# Altium PCB PiMX8MP_r0.3.PcbDoc (part 4 of 10)
Units mm, origin at the board's own origin, x right, y up, seen from the top; angles counter-clockwise.
Board outline 55 x 40 mm, 10 copper layers (Top Layer, Layer 1, Layer 2, Layer 3, Layer 4, Layer 5, Layer 6, Layer 7, Layer 8, Bottom Layer), stack 1.472 mm thick; 545 components, 477 nets, 2606 pads, 2278 vias.
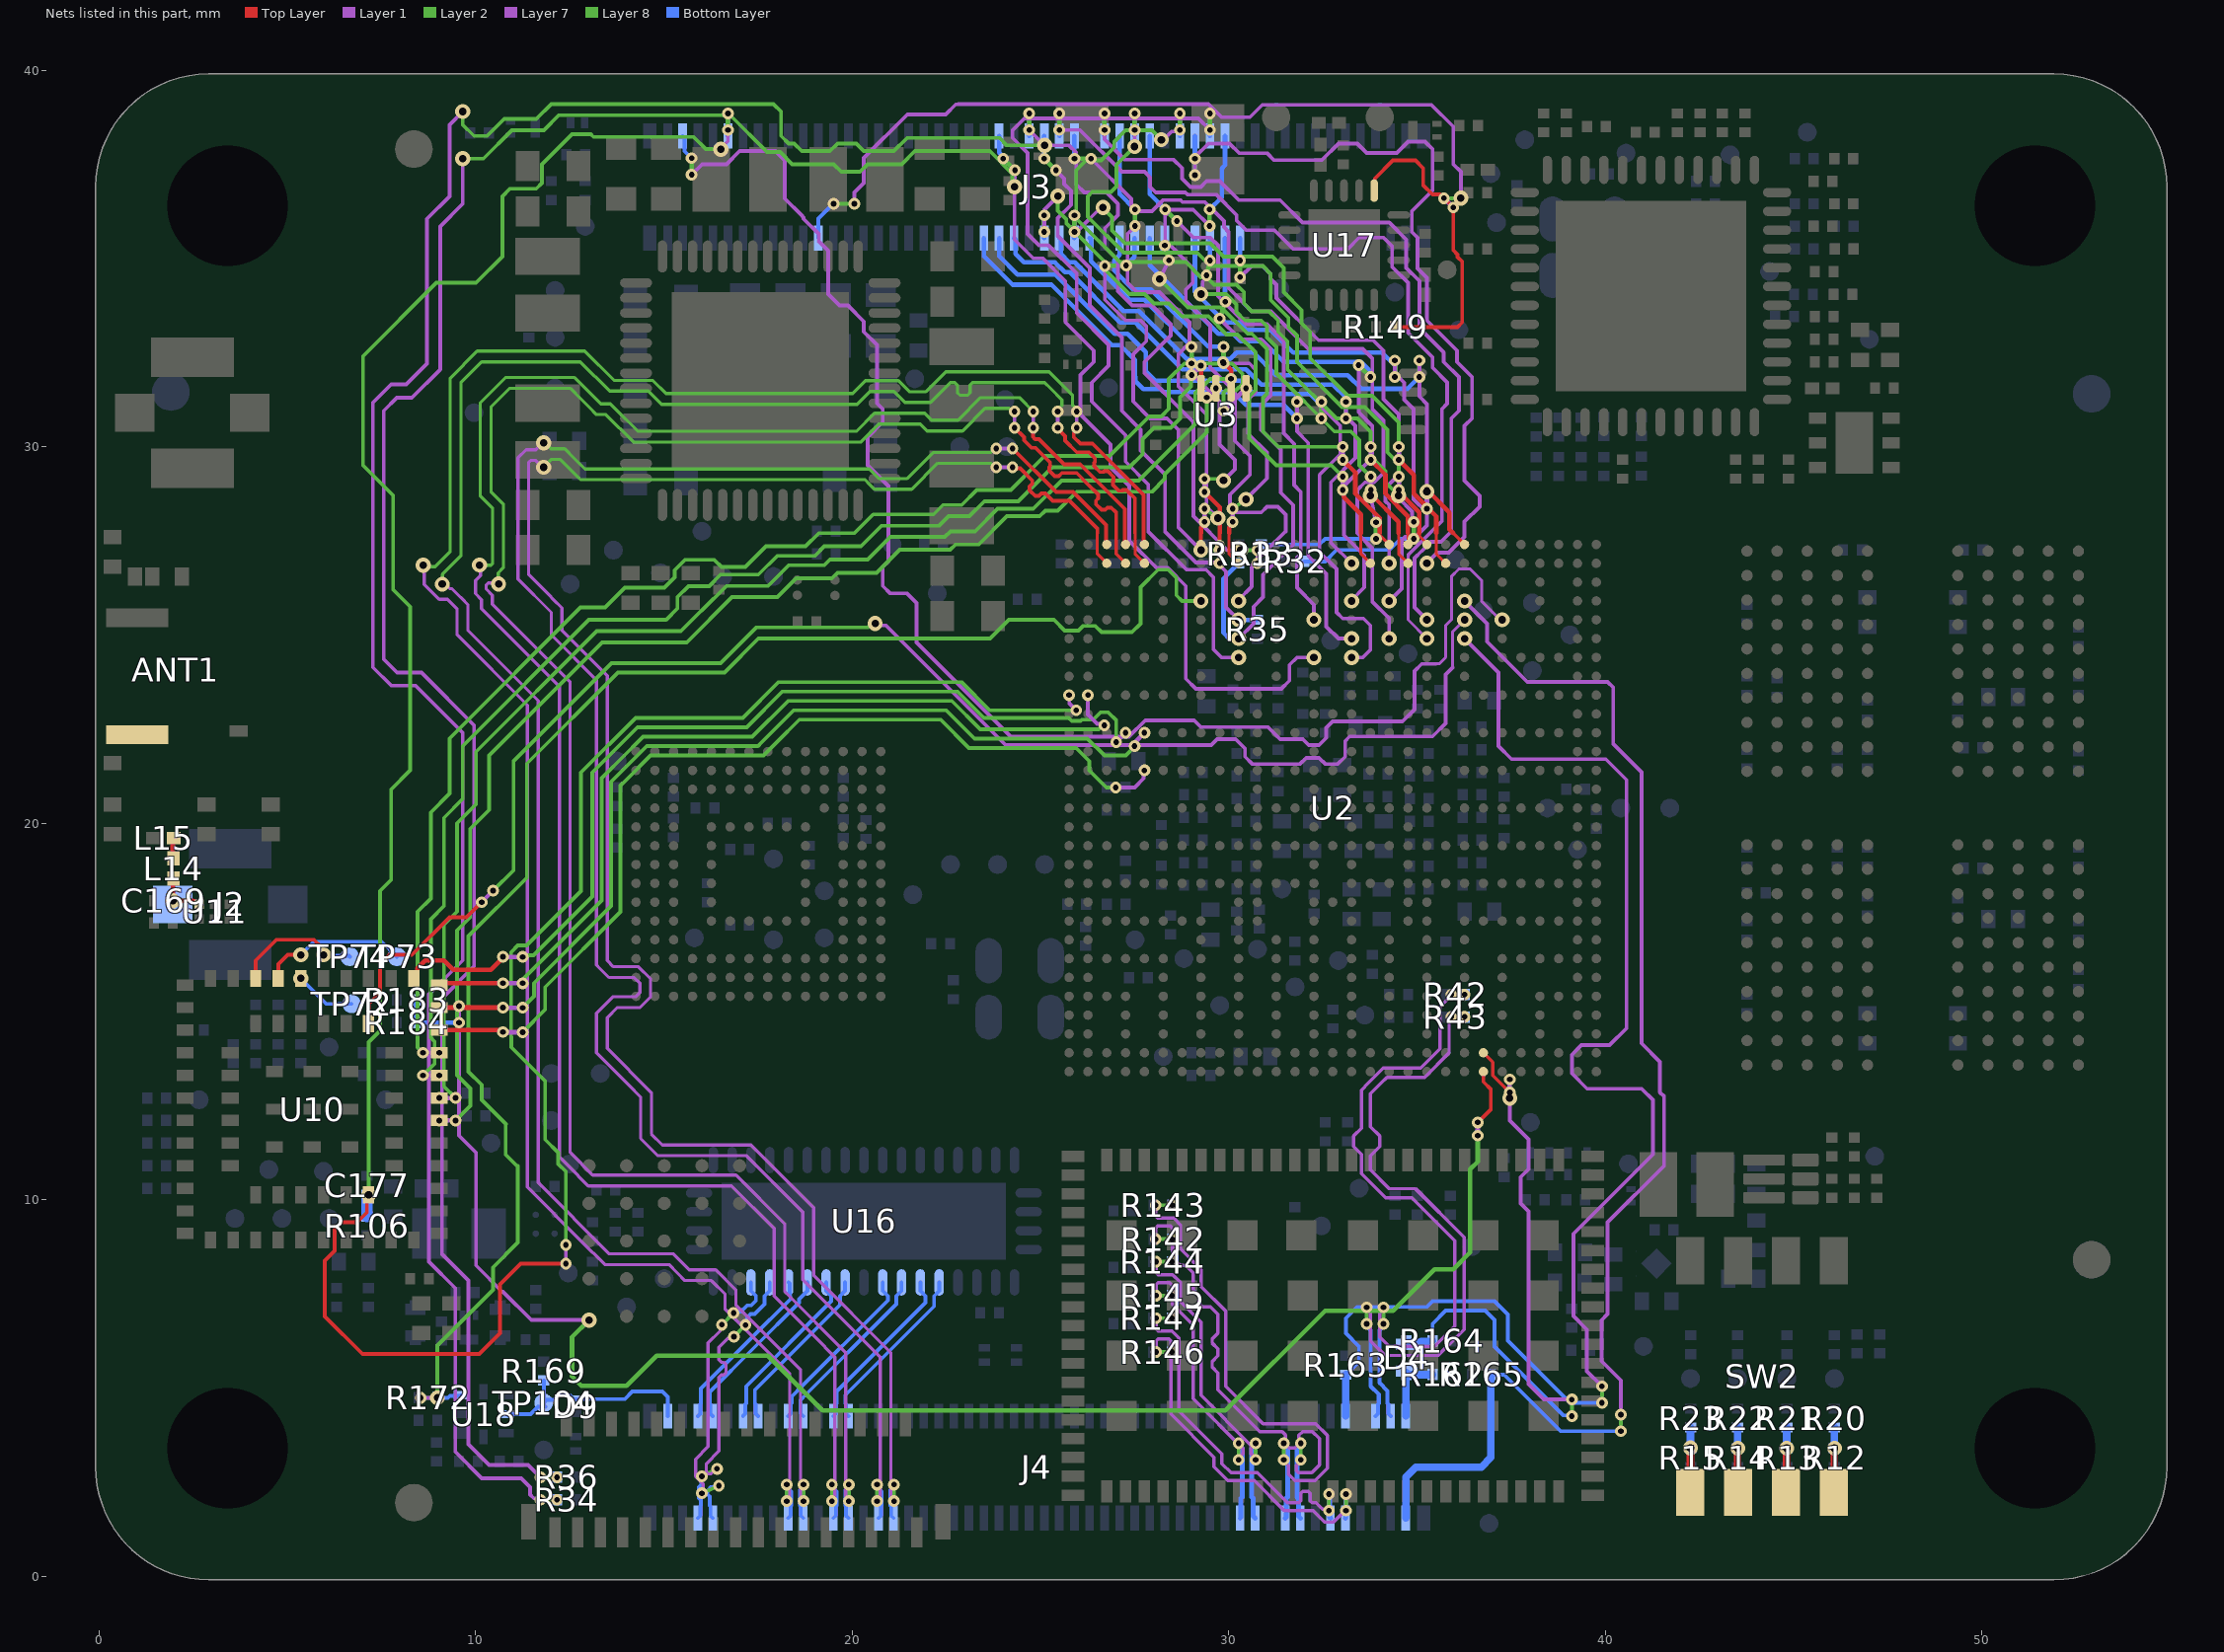
[diagram p12: the nets of this part, all layers, seen from the top]

## Via types
v1: diameter 0.4, hole 0.2, Top Layer to Bottom Layer, tented both sides, 946 vias
v2: diameter 0.31, hole 0.15, Top Layer to Layer 1, tented both sides, 321 vias
v3: diameter 0.31, hole 0.15, Layer 8 to Bottom Layer, tented both sides, 315 vias
v4: diameter 0.31, hole 0.15, Layer 1 to Layer 2, tented both sides, 257 vias
v5: diameter 0.31, hole 0.15, Layer 7 to Layer 8, tented both sides, 198 vias
v6: diameter 0.4, hole 0.2, Layer 2 to Layer 7, tented both sides, 169 vias
v7: diameter 0.31, hole 0.15, Top Layer to Layer 1, tented top, 72 vias

## Nets (pads, with @x,y where several pads share a name; then routed paths per layer and width w, separated by ;. In a path a pad name is that pad's centre, name@x,y a point inside that pad or via, vN(x,y) a via of type N, cw(c..) or ccw(c..) an arc to the next point about the centre after c; other vN are vias at no path point) (continued)
BB_CON_HDMI0_SDA: D9.1 J4.99 R169.1 TP104.TP U18.6 | length 5.9
  Bottom Layer w0.1: U18.6@10.812,4.304 11.462,4.304 11.657,4.499 TP104.TP@11.856,4.499 ; TP104.TP@11.812,4.494 TP104.TP@11.812,4.604 ; R169.1@11.812,5.204 TP104.TP@11.812,4.604 ; J4.99@15.102,4.254 15.102,4.764 14.962,4.904 14.162,4.904 13.962,4.704 12.612,4.704 12.512,4.804 12.212,4.804 12.089,4.681 11.889,4.681 TP104.TP@11.812,4.604
BB_CON_HDMI0_SDA_DYN: R172.1 U2.AF22 U18.3 | length 42
  Layer 2 w0.1: v6(8.987,4.739) 8.987,6.129 10.462,7.604 10.462,8.204 11.123,8.865 11.123,10.894 11.117,10.9 ; 11.1,10.9 10.8,11.2 10.8,12 10.808,12.008 10.162,12.654 10.162,13.054 9.812,13.404 9.812,17.004 11.362,18.554 11.362,21.584 13.782,24.004 16.612,24.004 17.512,24.904 23.662,24.904 24.162,25.404 25.359,25.404 25.644,25.119 26.011,25.119 26.131,25.239 26.461,25.239 26.626,25.074 27.126,25.074 27.432,25.074 27.662,25.304 27.662,26.271 28.126,26.734 28.399,26.734 28.612,26.521 28.612,26.054 28.762,25.904 v1(29.262,25.904)
  Layer 7 w0.1: v5(8.547,4.739) v6(8.987,4.739)
  Layer 8 w0.1: v5(8.547,4.739) v6(8.987,4.739)
  Bottom Layer w0.1: v6(8.987,4.739) 9.267,4.739 9.321,4.793 9.601,4.793 U18.3@9.612,4.804
  other v3: 8.987,4.739
BB_CON_HDMI0_TX0_N: J4.84 U2.AJ25 | length 60.5
  Top Layer w0.1: v2(25.962,30.504) 25.962,30.448 25.885,30.371 25.885,30.258 26.059,30.084 26.382,30.084 27.742,28.724 27.742,27.704 27.742,27.442 U2.AJ25@27.734,27.433
  Layer 1 w0.1: v2(25.962,30.504) v4(25.962,30.937)
  Layer 2 w0.085: v6@8.712,26.754 8.772,26.815 8.925,26.815 9.327,27.217 9.327,31.823 10.044,32.539 12.901,32.539 13.679,31.762 13.871,31.762 ; 14.062,31.762 13.871,31.762 ; v4(25.962,30.937) 25.962,30.992 25.855,31.099 25.855,31.365 25.23,31.989 24.924,31.989 24.394,31.989 22.49,31.989 21.962,31.462 21.52,31.462 21.228,31.754 20.355,31.754 20.012,31.412 15.055,31.412 14.705,31.762 13.871,31.762
  Layer 7 w0.085: v6(8.612,26.854) 8.637,26.83 8.637,26.346 9.035,25.947 9.254,25.947 9.512,25.689 9.512,25.004 11.379,23.138 11.379,10.335 12.811,8.903 13.437,8.277 15.137,8.277 15.361,8.053 15.559,7.854 16.262,7.854 16.627,7.489 16.627,7.089 18.345,5.372 18.345,2.138 18.262,2.055 v5(18.262,1.994) ; v5@18.312,1.954 v5@18.312,1.994
  Layer 8 w0.1: v5(18.262,1.994) v3(18.262,2.434)
  Bottom Layer w0.1: v3(18.262,2.434) 18.262,2.381 18.387,2.256 18.387,1.883 18.367,1.863 18.367,1.609 J4.84@18.302,1.544
BB_CON_HDMI0_TX0_P: J4.82 U2.AH25 | length 60.2
  Top Layer w0.08: 27.512,27.704 27.512,27.517 27.512,27.154 U2.AH25@27.762,26.904
  Top Layer w0.1: v2(25.462,30.504) 25.462,30.476 25.655,30.283 25.655,30.163 25.964,29.854 26.287,29.854 26.4,29.742 26.448,29.694 26.448,29.595 26.431,29.577 26.431,29.478 26.579,29.33 26.678,29.33 26.695,29.347 26.794,29.347 26.943,29.199 26.943,29.1 26.926,29.082 26.926,28.983 27.074,28.835 27.173,28.835 27.19,28.852 27.289,28.852 27.325,28.817 27.512,28.629 27.512,27.704
  Layer 1 w0.1: v2(25.462,30.504) v4(25.462,30.937)
  Layer 2 w0.085: v6@9.126,26.461 9.126,26.613 9.612,27.099 9.612,31.704 10.162,32.254 12.783,32.254 13.561,31.477 14.587,31.477 14.937,31.127 20.13,31.127 20.473,31.469 21.11,31.469 21.402,31.177 22.08,31.177 22.42,31.517 22.608,31.704 22.731,31.704 22.798,31.637 22.798,31.435 22.865,31.368 23.066,31.368 23.133,31.435 23.133,31.637 23.2,31.704 23.312,31.704 24.512,31.704 25.042,31.704 25.112,31.704 25.262,31.554 25.57,31.247 25.57,31.099 25.462,30.992 v4(25.462,30.937)
  Layer 7 w0.085: v6(9.116,26.351) 9.201,26.351 9.32,26.232 9.372,26.232 9.556,26.048 9.63,25.974 9.797,25.807 9.797,25.123 11.664,23.256 11.664,10.453 13.555,8.562 15.255,8.562 15.479,8.338 15.677,8.139 16.38,8.139 16.912,7.608 16.912,7.208 18.63,5.49 18.63,2.138 18.712,2.055 v5(18.712,1.994)
  Layer 8 w0.1: v5(18.712,1.994) v3(18.712,2.434)
  Bottom Layer w0.1: 18.617,2.283 18.617,1.883 18.637,1.863 18.637,1.609 J4.82@18.702,1.544
BB_CON_HDMI0_TX1_N: J4.78 U2.AJ26 | length 58.3
  Top Layer w0.1: v2(24.812,30.504) 24.802,30.494 24.802,30.263 24.861,30.204 24.962,30.204 25.632,29.534 26.057,29.534 27.242,28.35 27.242,27.442 U2.AJ26@27.234,27.433
  Layer 1 w0.1: v2(24.812,30.504) v4(24.812,30.937)
  Layer 2 w0.085: v6@10.209,26.807 10.254,26.852 10.405,26.852 10.455,26.902 10.455,28.362 10.127,28.689 10.127,31.173 10.794,31.839 12.63,31.839 13.329,31.14 13.579,31.14 13.7,31.02 14.308,30.412 20.117,30.412 20.594,30.889 21.927,30.889 22.111,30.706 22.814,30.706 23.414,31.306 24.443,31.306 v4(24.812,30.937)
  Layer 7 w0.085: v6(10.109,26.858) 10.133,26.834 10.133,26.58 10,26.447 10,26.101 10.161,25.94 10.161,25.703 12.229,23.635 12.229,11.135 12.461,10.903 12.994,10.369 16.797,10.369 17.927,9.239 17.927,7.439 19.012,6.354 19.545,5.822 19.545,2.138 19.462,2.055 v5(19.462,1.994)
  Layer 8 w0.1: v5(19.462,1.994) v3(19.462,2.434)
  Bottom Layer w0.1: v3(19.462,2.434) 19.462,2.381 19.587,2.256 19.587,1.883 19.567,1.863 19.567,1.609 J4.78@19.502,1.544
BB_CON_HDMI0_TX1_P: J4.76 U2.AH26 | length 58.2
  Top Layer w0.08: 27.012,27.704 27.012,27.517 27.012,27.154 U2.AH26@27.262,26.904
  Top Layer w0.1: v2(24.312,30.504) 24.566,30.251 24.566,30.227 24.572,30.221 24.572,30.168 24.765,29.974 24.867,29.974 24.975,29.867 25.257,29.584 25.257,29.485 25.235,29.463 25.235,29.364 25.384,29.215 25.483,29.215 25.572,29.304 25.887,29.304 25.962,29.304 26.253,29.014 26.536,28.731 26.536,28.632 26.476,28.572 26.476,28.473 26.625,28.325 26.724,28.325 26.783,28.384 26.882,28.384 27.004,28.262 27.012,28.254 27.012,27.704
  Layer 1 w0.1: v2(24.312,30.504) v4(24.312,30.937)
  Layer 2 w0.085: v6@10.622,26.465 10.606,26.481 10.606,26.651 10.74,26.784 10.74,28.48 10.412,28.808 10.412,31.054 10.912,31.554 12.512,31.554 12.812,31.254 13.012,31.054 13.211,30.855 13.461,30.855 14.19,30.127 20.235,30.127 20.712,30.604 21.809,30.604 21.993,30.421 22.932,30.421 23.532,31.021 24.167,31.021 24.251,30.937 v4(24.312,30.937)
  Layer 7 w0.085: v6(10.612,26.354) 10.588,26.379 10.334,26.379 10.285,26.329 10.285,26.219 10.446,26.058 10.446,25.821 11.112,25.154 11.13,25.136 12.514,23.753 12.514,11.253 13.112,10.654 16.915,10.654 18.212,9.358 18.212,7.558 19.83,5.94 19.83,2.138 19.912,2.055 v5(19.912,1.994)
  Layer 8 w0.1: v5(19.912,1.994) v3(19.912,2.434)
  Bottom Layer w0.1: 19.817,2.283 19.817,1.883 19.837,1.863 19.837,1.609 J4.76@19.902,1.544
BB_CON_HDMI0_TX2_N: J4.72 U2.AJ27 | length 54
  Top Layer w0.1: v2(24.262,29.954) 25.42,28.797 25.87,28.797 26.742,27.924 26.742,27.442 U2.AJ27@26.734,27.433
  Layer 1 w0.1: v4(23.83,29.954) v2(24.262,29.954)
  Layer 2 w0.085: v6@11.812,30.054 11.897,30.054 12.005,29.947 12.37,29.947 12.612,29.704 12.905,29.412 20.458,29.412 20.714,29.156 21.464,29.156 22.155,29.847 23.668,29.847 23.775,29.954 v4(23.83,29.954)
  Layer 7 w0.085: v6(11.812,30.104) 11.787,30.104 11.605,29.922 11.344,29.922 11.127,29.705 11.127,26.486 12.012,25.601 12.012,25.001 13.212,23.801 13.212,16.236 13.296,16.153 13.544,15.904 14.212,15.904 14.362,15.754 14.362,15.504 14.247,15.389 13.644,15.389 13.212,14.958 13.212,13.901 14.061,13.053 14.386,12.728 14.386,11.628 14.844,11.169 17.197,11.169 18.692,9.674 18.692,7.874 19.912,6.654 20.745,5.822 20.745,2.138 20.662,2.055 v5(20.662,1.994)
  Layer 8 w0.1: v5(20.662,1.994) v3(20.662,2.434)
  Bottom Layer w0.1: v3(20.662,2.434) 20.662,2.381 20.787,2.256 20.787,1.883 20.767,1.863 20.767,1.609 J4.72@20.702,1.544
BB_CON_HDMI0_TX2_P: J4.70 U2.AH27 | length 53.9
  Top Layer w0.08: 26.512,27.704 26.512,27.517 26.512,27.154 U2.AH27@26.762,26.904
  Top Layer w0.1: v2(24.262,29.454) 24.291,29.426 24.465,29.426 24.5,29.392 24.782,29.109 24.782,29.01 24.715,28.942 24.715,28.843 24.863,28.695 24.962,28.695 25.03,28.762 25.129,28.762 25.221,28.671 25.325,28.567 25.775,28.567 26.512,27.829 26.512,27.704
  Layer 1 w0.1: v4(23.83,29.454) v2(24.262,29.454)
  Layer 2 w0.085: v6@11.897,29.554 12.005,29.662 12.252,29.662 12.411,29.503 12.709,29.204 ; 12.626,29.288 12.709,29.204 ; v4(23.83,29.454) 23.775,29.454 23.668,29.562 22.273,29.562 21.582,28.871 20.595,28.871 20.462,29.004 20.34,29.127 12.787,29.127 12.709,29.204
  Layer 7 w0.085: v6(11.812,29.454) 11.787,29.454 11.605,29.637 11.462,29.637 11.412,29.587 11.412,26.604 11.962,26.054 12.063,25.954 12.297,25.719 12.297,25.119 13.497,23.919 13.497,16.354 13.662,16.189 14.33,16.189 14.647,15.873 14.647,15.386 14.365,15.104 13.762,15.104 13.497,14.839 13.497,14.019 14.671,12.846 14.671,11.746 14.962,11.454 17.315,11.454 18.977,9.793 18.977,7.993 21.03,5.94 21.03,2.138
  Layer 8 w0.1: v5(21.112,1.994) v3(21.112,2.434)
  Bottom Layer w0.1: J4.70@21.102,1.544 21.037,1.609 21.037,1.863 21.017,1.883 21.017,2.283 21.112,2.378 v3(21.112,2.434)
BB_CON_LVDS/DSI_CLK_N: J4.87 U16.10 | length 4.6
  Bottom Layer w0.1: J4.87@17.502,4.254 17.437,4.319 17.437,4.573 17.417,4.593 17.417,4.949 19.677,7.209 19.677,7.446 19.812,7.581 U16.10@19.812,7.804
BB_CON_LVDS/DSI_CLK_P: J4.89 U16.11 | length 4.6
  Bottom Layer w0.1: J4.89@17.102,4.254 17.167,4.319 17.167,4.573 17.187,4.593 17.187,5.044 19.447,7.304 19.447,7.446 19.312,7.581 U16.11@19.312,7.804
BB_CON_LVDS/DSI_D0_N: J4.75 U16.5 | length 4.6
  Bottom Layer w0.1: J4.75@19.902,4.254 19.837,4.319 19.837,4.573 19.817,4.593 19.817,4.809 22.177,7.169 22.177,7.446 22.312,7.581 U16.5@22.312,7.804
BB_CON_LVDS/DSI_D0_P: J4.77 U16.6 | length 4.6
  Bottom Layer w0.1: J4.77@19.502,4.254 19.567,4.319 19.567,4.573 19.587,4.593 19.587,4.905 21.947,7.265 21.947,7.446 21.812,7.581 U16.6@21.812,7.804
BB_CON_LVDS/DSI_D1_N: J4.81 U16.7 | length 4.7
  Bottom Layer w0.1: J4.81@18.702,4.254 18.637,4.319 18.637,4.579 18.623,4.593 18.623,4.676 18.781,4.834 20.939,6.992 21.177,7.23 21.177,7.446 21.312,7.581 U16.7@21.312,7.804
BB_CON_LVDS/DSI_D1_P: J4.83 U16.8 | length 4.7
  Bottom Layer w0.1: J4.83@18.302,4.254 18.367,4.319 18.367,4.573 18.393,4.599 18.393,4.771 18.686,5.064 20.843,7.222 20.947,7.326 20.947,7.446 20.812,7.581 U16.8@20.812,7.804
BB_CON_LVDS/DSI_D2_N: J4.93 U16.12 | length 4.7
  Bottom Layer w0.1: J4.93@16.302,4.254 16.237,4.319 16.237,4.573 16.217,4.593 16.217,4.891 17.394,6.067 18.594,7.268 18.594,7.363 18.812,7.581 U16.12@18.812,7.804
BB_CON_LVDS/DSI_D2_P: J4.95 U16.13 | length 4.6
  Bottom Layer w0.1: J4.95@15.902,4.254 15.967,4.319 15.967,4.573 15.987,4.593 15.987,4.986 17.299,6.297 18.364,7.363 18.364,7.446 18.341,7.469 18.341,7.776 U16.13@18.312,7.804
BB_CON_LVDS/DSI_D3_N: J4.94 U16.15 | length 8.2
  Layer 7 w0.085: v5(16.012,2.204) 16.045,2.237 16.045,2.451 15.845,2.651 15.845,3.111 16.177,3.443 16.177,6.2 16.498,6.521 16.498,6.637 v5(16.541,6.68)
  Layer 8 w0.1: v5(16.012,2.204) v3(16.462,2.404) ; v5(16.541,6.68) v3(16.852,6.991)
  Bottom Layer w0.1: J4.94@16.302,1.544 16.237,1.609 16.237,1.863 16.217,1.883 16.217,2.12 16.161,2.176 16.161,2.274 16.261,2.374 16.432,2.374 v3(16.462,2.404) ; v3(16.852,6.991) 16.89,7.029 17.046,7.029 17.213,7.197 17.318,7.197 17.447,7.326 17.447,7.446 17.312,7.581 U16.15@17.312,7.804
BB_CON_LVDS/DSI_D3_P: J4.96 U16.14 | length 8.1
  Layer 7 w0.085: v5(16.412,2.854) 16.385,2.854 16.25,2.719 16.179,2.719 16.13,2.769 16.13,2.993 16.462,3.325 16.462,4.904 16.462,5.282 16.529,5.349 16.588,5.349 16.655,5.416 16.655,5.617 16.588,5.684 16.529,5.684 16.462,5.751 16.462,5.854 16.462,6.082 16.699,6.319 16.816,6.319 v5(16.859,6.362)
  Layer 8 w0.1: v3(16.012,2.654) v5(16.412,2.854) ; v5(16.859,6.362) v3(17.17,6.673)
  Bottom Layer w0.1: J4.96@15.902,1.544 15.967,1.609 15.967,1.863 15.987,1.883 15.987,2.024 15.931,2.081 15.931,2.37 15.998,2.437 15.998,2.641 v3(16.012,2.654) ; v3(17.17,6.673) 17.208,6.711 17.208,6.867 17.308,6.967 17.414,6.967 17.677,7.23 17.677,7.446 17.812,7.581 U16.14@17.812,7.804
BB_CON_OTG_ID: D4.1 J4.1 R162.1 | length 1.9
  Bottom Layer w0.2: J4.1@34.702,4.254 34.702,5.394 D4.1@34.712,5.404 34.762,5.354 R162.1@35.412,5.354
BB_CON_PCIE_CLK_N: J4.12 R147.1 | length 10.2
  Layer 7 w0.09: v5(28.072,6.854) 28.072,6.562 28.125,6.509 28.496,6.509 28.672,6.334 28.672,4.394 29.822,3.244 29.822,2.991 30.061,2.753 30.764,2.753 31.562,1.954 31.862,1.954 31.912,2.004 31.912,2.202 31.965,2.254 32.109,2.254 32.162,2.202 32.162,2.004 32.212,1.954 32.325,1.954 32.493,1.787 32.62,1.787 v5(32.662,1.744)
  Layer 8 w0.1: v5(28.072,6.854) v3(28.492,6.854) v3@28.512,6.854 ; v5(32.662,1.744) v3(32.662,2.184)
  Bottom Layer w0.13: v3(32.662,2.184) 32.682,2.164 32.682,1.564 J4.12@32.702,1.544
BB_CON_PCIE_CLK_P: J4.10 R146.1 | length 10.3
  Layer 7 w0.09: v5(28.072,5.954) 28.072,6.247 28.125,6.299 28.409,6.299 28.462,6.247 28.462,4.307 29.612,3.157 29.612,2.904 29.974,2.543 30.677,2.543 31.475,1.744 32.238,1.744 32.538,1.444 32.786,1.444 33.086,1.744 v5(33.112,1.744)
  Layer 8 w0.1: v5(28.072,5.954) v3(28.492,5.954) v3@28.512,5.954 ; v5(33.112,1.744) v3(33.112,2.184)
  Bottom Layer w0.13: J4.10@33.102,1.544 33.107,1.549 33.107,2.179 v3(33.112,2.184)
BB_CON_PCIe_CLK_REQ: J4.2 R165.1 U2.AF8 | length 36.2
  Layer 7 w0.1: v1(36.262,25.904) 36.862,25.304 36.862,24.824 37.931,23.754 40.062,23.754 40.212,23.604 40.212,22.104 40.962,21.354 40.962,14.156 41.452,13.666 41.452,12.854 41.562,12.744 41.562,10.904 40.062,9.404 40.062,6.964 39.902,6.804 39.902,5.714 40.412,5.204 v5(40.412,4.294)
  Layer 8 w0.1: v3(40.412,3.854) v5(40.412,4.294)
  Bottom Layer w0.1: R165.1@36.962,5.354 37.312,5.354 38.812,3.854 v3(40.412,3.854)
  Bottom Layer w0.2: J4.2@34.702,1.544 34.702,2.63 34.972,2.899 36.707,2.899 36.962,3.154 R165.1@36.962,5.354
BB_CON_PCIE_RST: J4.9 R163.1 U2.AD8 | length 38.9
  Layer 7 w0.1: v1(36.262,24.904) 37.162,24.004 37.162,22.054 37.512,21.704 40.012,21.704 40.562,21.154 40.562,14.554 40.112,14.104 39.362,14.104 39.112,13.854 39.112,13.354 39.517,12.949 40.967,12.949 41.262,12.654 41.262,11.204 39.152,9.094 39.152,6.914 39.512,6.554 39.512,5.444 v5(39.912,5.044)
  Layer 8 w0.1: v3(39.912,4.604) v5(39.912,5.044)
  Bottom Layer w0.1: R163.1@33.112,5.354 33.127,5.354 33.462,5.689 33.462,6.104 33.112,6.454 33.112,6.854 33.412,7.154 35.262,7.154 35.412,7.304 37.062,7.304 37.412,6.954 37.412,6.254 39.062,4.604 v3(39.912,4.604)
  Bottom Layer w0.2: J4.9@33.102,4.254 33.102,5.344 R163.1@33.112,5.354
BB_CON_PCIE_RX_N: J4.18 R143.1 | length 14.6
  Layer 7 w0.09: v5(28.062,9.854) 28.062,9.562 28.115,9.509 28.544,9.509 28.719,9.334 28.719,8.697 29.272,8.144 29.272,7.694 29.922,7.044 29.922,5.044 30.912,4.054 32.309,4.054 32.622,3.741 32.622,2.867 32.296,2.542 31.758,2.542 31.582,2.717 31.582,2.932 31.462,3.052 v5(31.462,3.094)
  Layer 8 w0.1: v5(28.062,9.854) v3(28.502,9.854) ; v5(31.462,3.094) v3(31.462,3.534)
  Bottom Layer w0.13: v3(31.462,3.534) 31.462,3.486 31.562,3.386 31.562,2.104 31.527,2.069 31.527,1.569 J4.18@31.502,1.544
BB_CON_PCIE_RX_P: J4.16 R142.1 | length 14.6
  Layer 7 w0.09: v5(28.062,8.954) 28.062,9.247 28.115,9.299 28.457,9.299 28.509,9.247 28.509,8.61 28.614,8.506 28.614,8.353 28.711,8.256 28.864,8.256 29.062,8.057 29.062,7.607 29.212,7.457 29.212,7.254 29.311,7.156 29.514,7.156 29.712,6.957 29.712,6.454 29.562,6.304 29.562,6.192 29.712,6.042 29.712,5.854 29.562,5.704 29.562,5.552 29.712,5.402 29.712,4.957 30.825,3.844 31.422,3.844 31.512,3.754 31.512,3.504 31.612,3.404 31.762,3.404 31.862,3.504 31.862,3.744 31.962,3.844 32.222,3.844 32.412,3.654 32.412,2.954 32.209,2.752 31.845,2.752 31.792,2.804 31.792,2.932 31.912,3.052 v5(31.912,3.094)
  Layer 8 w0.1: v5(28.062,8.954) v3(28.502,8.954) ; v5(31.912,3.094) v3(31.912,3.534)
  Bottom Layer w0.13: J4.16@31.902,1.544 31.852,1.594 31.852,2.064 31.812,2.104 31.812,3.386 31.912,3.486 v3(31.912,3.534)
BB_CON_PCIEC_TX_N: J4.24 R145.1 | length 9.3
  Layer 7 w0.09: v5(28.072,7.454) 28.072,7.747 28.125,7.799 28.425,7.799 28.502,7.722 28.502,7.217 29.052,6.667 29.052,6.504 29.052,6.119 28.984,6.051 28.982,6.051 28.914,5.983 28.914,5.779 28.982,5.711 28.984,5.711 29.052,5.643 29.052,5.354 29.052,4.717 30.382,3.387 30.382,3.257 30.262,3.137 v5(30.262,3.094)
  Layer 8 w0.1: v5(28.072,7.454) v3(28.492,7.454) ; v5(30.262,3.094) v3(30.262,3.534)
  Bottom Layer w0.13: v3(30.262,3.534) 30.262,3.486 30.362,3.386 30.362,2.104 30.327,2.069 30.327,1.569 J4.24@30.302,1.544
BB_CON_PCIEC_TX_P: J4.22 R144.1 | length 9.5
  Layer 7 w0.09: v5(28.072,8.354) 28.072,8.062 28.125,8.009 28.512,8.009 28.712,7.809 28.712,7.304 29.262,6.754 29.262,4.804 30.592,3.474 30.592,3.257 30.712,3.137 v5(30.712,3.094)
  Layer 8 w0.1: v5(28.072,8.354) v3(28.492,8.354) v3@28.512,8.354 ; v5(30.712,3.094) v3(30.712,3.534)
  Bottom Layer w0.13: J4.22@30.702,1.544 30.652,1.594 30.652,2.064 30.612,2.104 30.612,3.386 30.712,3.486 v3(30.712,3.534)
BB_CON_USB_D_N: J4.3 R42.2 | length 18.6
  Layer 7 w0.09: v5(34.112,7.144) 34.112,7.087 34.007,6.982 34.007,6.354 34.257,6.104 35.462,6.104 36.007,6.649 36.007,8.909 34.862,10.054 34.163,10.054 33.522,10.695 33.522,11.207 33.317,11.412 33.317,11.697 33.522,11.902 33.522,12.914 33.712,13.104 34.102,13.494 35.102,13.494 35.612,14.004 35.612,15.123 35.91,15.421 v5(35.91,15.452)
  Layer 8 w0.1: v3(34.112,6.704) v5(34.112,7.144) ; v5(35.91,15.452) v3@36.26,15.452 ; v3@36.257,15.454 v3@36.26,15.452 ; v3(36.262,15.449) v3@36.26,15.452
  Bottom Layer w0.11: v3(34.112,6.704) 34.112,6.65 34.002,6.54 34.002,5.14 34.217,4.925 34.217,4.594 34.242,4.569 34.242,4.314 J4.3@34.302,4.254
BB_CON_USB_D_P: J4.5 R43.2 | length 18.7
  Layer 7 w0.09: v5(33.662,7.144) 33.662,7.087 33.767,6.982 33.767,6.255 34.158,5.864 35.562,5.864 36.247,6.55 36.247,9.009 34.962,10.294 34.262,10.294 33.762,10.794 33.762,11.167 34.007,11.412 34.007,11.697 33.762,11.942 33.762,12.815 34.052,13.104 34.202,13.254 35.202,13.254 35.852,13.905 35.852,14.699 35.868,14.715 35.868,14.82 v5(35.91,14.862)
  Layer 8 w0.1: v3(33.662,6.704) v5(33.662,7.144) ; v5(35.91,14.862) v3@36.26,14.862
  Bottom Layer w0.11: v3(33.662,6.704) 33.662,6.65 33.772,6.54 33.772,5.044 33.987,4.829 33.987,4.594 33.962,4.569 33.962,4.314 J4.5@33.902,4.254
  other v3: 36.262,14.859
BB_CON_USB_ID: D4.2 R164.1 U2.B7 | length 18.4
  Top Layer w0.08: U2.B7@36.762,13.904 37.012,13.654 37.012,13.299 37.207,13.104
  Top Layer w0.1: 37.207,13.104 v2(37.462,12.849)
  Layer 1 w0.12: v2@37.462,12.949 v4(37.462,13.199)
  Layer 2 w0.12: v6(37.462,12.699) v4(37.462,13.199)
  Layer 7 w0.1: v6(37.462,12.699) 37.462,12.104 37.962,11.604 37.962,10.812 37.752,10.602 37.752,9.898 37.962,9.688 37.962,5.104 38.372,4.694 v5(39.112,4.694)
  Layer 8 w0.1: v3(39.112,4.254) v5(39.112,4.694)
  Bottom Layer w0.1: R164.1@35.412,6.254 35.412,6.704 35.762,7.054 36.812,7.054 37.062,6.804 37.062,6.104 38.897,4.27 39.097,4.27 v3(39.112,4.254)
  Bottom Layer w0.2: D4.2@34.712,6.154 34.762,6.204 35.082,6.204 35.118,6.24 35.398,6.24 R164.1@35.412,6.254
BOOT_R_MODE0: R12.1 R20.2 SW2.4 | length 1.7
  Top Layer w0.2: SW2.4@46.086,2.286 v1(46.086,3.4)
  Bottom Layer w0.2: R12.1@46.086,3.364 R20.2@46.086,3.95
BOOT_R_MODE1: R13.1 R21.2 SW2.3 | length 1.8
  Top Layer w0.2: SW2.3@44.818,2.182 v1(44.818,3.4)
  Bottom Layer w0.2: v1(44.818,3.4) R21.2@44.818,3.95
BOOT_R_MODE2: R14.1 R22.2 SW2.2 | length 1.7
  Top Layer w0.2: SW2.2@43.517,2.167 v1(43.517,3.4)
  Bottom Layer w0.2: R14.1@43.517,3.433 R22.2@43.517,3.95
BOOT_R_MODE3: R15.1 R23.2 SW2.1 | length 1.7
  Top Layer w0.2: SW2.1@42.262,2.338 v1(42.262,3.404)
  Bottom Layer w0.2: R23.2@42.262,3.95 42.262,3.488 R15.1@42.35,3.4
BT_DEVICE_WAKE: U2.AE8 U10.51 | length 41
  Top Layer w0.1: U10.51@7.162,14.679 7.162,15.204 7.462,15.504 7.462,16.254 7.712,16.504 8.312,16.504 9.312,17.504 9.762,17.504 v2(10.162,17.904)
  Layer 1 w0.1: v2(10.162,17.904) v4(10.468,18.21)
  Layer 2 w0.1: v4(10.468,18.21) 11.012,18.754 11.012,21.654 13.612,24.254 16.512,24.254 17.462,25.204 20.431,25.204 20.531,25.304 v6(20.612,25.304)
  Layer 7 w0.08: 35.942,24.134 35.942,25.084 v1(36.262,25.404)
  Layer 7 w0.1: v6(20.612,25.304) 20.662,25.254 20.896,25.254 24.076,22.074 25.462,22.074 29.532,22.074 29.692,22.234 30.182,22.234 30.432,21.984 30.432,21.768 30.626,21.574 31.306,21.574 31.899,21.574 32.059,21.734 32.399,21.734 32.559,21.574 32.899,21.574 33.092,21.768 33.092,22.184 33.212,22.304 35.412,22.304 35.762,22.654 35.762,23.954 35.942,24.134
BT_GPIO_2: TP72.TP U10.18 | length 1.6
  Bottom Layer w0.1: v1(5.362,15.879) 6.037,15.204 TP72.TP@6.712,15.204
BT_GPIO_3: TP73.TP U10.19 | length 3.9
  Top Layer w0.1: U10.19@4.762,15.879 4.762,16.254 5.012,16.504 v1(5.362,16.504)
  Bottom Layer w0.1: v1(5.362,16.504) 5.712,16.854 7.512,16.854 TP73.TP@7.912,16.454
BT_GPIO_4: TP74.TP U10.20 | length 3.5
  Top Layer w0.1: U10.20@4.162,15.879 4.162,16.354 4.712,16.904 5.712,16.904 5.905,16.712 5.905,16.562 v1(5.962,16.504)
  Bottom Layer w0.1: v1(5.962,16.504) 5.987,16.479 6.637,16.479 TP74.TP@6.662,16.454
BT_HOST_WAKE: R183.1 R184.2 U2.A7 | length 46.1
  Top Layer w0.1: v2(36.612,12.054) 36.962,12.404 36.962,12.931 36.762,13.131 U2.A7@36.762,13.404
  Layer 1 w0.12: v4(36.612,11.704) v2@36.612,11.954
  Layer 2 w0.12: v1(13.012,6.804) 12.562,6.354 12.562,5.304 12.812,5.054 14.012,5.054 14.812,5.854 17.762,5.854 19.212,4.404 29.912,4.404 32.562,7.054 34.362,7.054 35.462,8.154 35.962,8.154 36.412,8.604 36.412,10.812 36.612,11.012 v4(36.612,11.704)
  Layer 7 w0.1: v5@9.562,15.054 9.562,11.704 10.012,11.254 10.012,8.254 10.71,7.556 10.73,7.556 11.481,6.804 v1(13.012,6.804)
  Layer 8 w0.1: v3(9.562,14.704) v5(9.562,15.144)
  Bottom Layer w0.12: R183.1@8.412,15.304 R184.2@8.412,14.704 v3(9.562,14.704)
BT_PCM_CLK: U3.8 U10.7 | length 36.1
  Top Layer w0.12: v2(29.85,32.25) 30.062,32.038 U3.8@30.062,31.554
  Layer 1 w0.12: v2(9.037,12.704) v4(9.47,12.704) ; v2(29.85,32.25) 30.062,32.038 v4(30.062,31.804)
  Layer 2 w0.1: v4(9.47,12.704) 9.162,13.012 9.162,17.304 9.512,17.654 9.512,19.999 10.012,20.499 10.012,21.899 13.217,25.104 15.452,25.104 16.002,25.654 16.012,25.654 16.662,26.304 17.762,26.304 18.312,26.854 19.262,26.854 19.412,27.004 20.412,27.004 21.012,27.604 22.462,27.604 22.612,27.754 23.262,27.754 23.862,28.354 24.532,28.354 24.812,28.354 25.562,29.104 27.607,29.104 29.112,30.609 29.112,31.02 29.11,31.023 29.11,31.433 29.281,31.604 29.312,31.604 29.512,31.804 v4(30.062,31.804)
BT_PCM_IN: U3.9 U10.6 | length 34.7
  Layer 1 w0.12: v2(9.037,12.104) v4(9.47,12.104) ; v4(29.415,31.307) v2(29.662,31.554)
  Layer 2 w0.1: v4(9.47,12.104) 9.862,12.497 9.862,12.954 9.512,13.304 9.512,17.154 9.857,17.499 9.857,19.849 10.362,20.354 10.362,21.804 13.362,24.804 15.612,24.804 16.812,26.004 18.012,26.004 18.512,26.504 19.462,26.504 19.612,26.654 20.654,26.654 21.262,27.263 22.604,27.263 22.745,27.404 23.362,27.404 24.112,28.154 24.658,28.154 24.981,28.154 25.131,28.304 25.462,28.304 25.962,28.804 27.962,28.804 28.307,29.149 28.307,29.276 29.415,30.383 v4(29.415,31.307)
BT_PCM_OUT: U3.7 U10.9 | length 37.4
  Layer 1 w0.12: v4(8.605,13.904) v2(9.037,13.904) ; v4(29.865,30.957) v2(30.462,31.554)
  Layer 2 w0.1: v4(8.605,13.904) 8.462,14.047 8.462,17.654 8.812,18.004 8.812,20.289 9.312,20.789 9.312,22.254 12.787,25.729 13.437,25.729 13.962,26.254 15.012,26.254 15.29,26.532 15.29,26.722 15.567,26.999 16.337,26.999 16.532,26.804 17.162,26.804 17.712,27.354 18.762,27.354 19.112,27.704 20.062,27.704 20.562,28.204 22.162,28.204 22.412,28.454 22.912,28.454 23.312,28.854 24.212,28.854 25.112,29.754 26.84,29.754 27.89,30.804 28.207,30.804 28.412,31.009 28.412,31.804 28.82,32.212 29.555,32.212 29.562,32.204 30.094,32.204 30.367,31.931 30.367,31.678 30.189,31.499 29.923,31.499 29.865,31.441 v4(29.865,30.957)
BT_PCM_SYNC: U3.10 U10.8 | length 35
  Top Layer w0.12: U3.10@29.262,31.554 v2(29.262,32.154)
  Layer 1 w0.12: v4(8.605,13.304) v2(9.037,13.304) ; v4(29.015,31.907) v2(29.262,32.154)
  Layer 2 w0.1: v4(8.605,13.304) 8.912,13.612 8.912,14.204 8.812,14.304 8.812,17.454 9.162,17.804 9.162,20.144 9.662,20.644 9.662,22.054 13.012,25.404 15.062,25.404 15.362,25.704 15.362,26.004 15.657,26.299 16.207,26.299 16.512,26.604 17.512,26.604 18.012,27.104 19.012,27.104 19.262,27.354 20.237,27.354 20.787,27.904 22.312,27.904 22.562,28.154 23.112,28.154 23.512,28.554 24.412,28.554 25.312,29.454 27.362,29.454 27.712,29.804 27.712,30.199 28.017,30.504 28.462,30.504 28.712,30.754 28.712,31.319 28.996,31.602 28.996,31.888 v4(29.015,31.907)
BT_REG_EN: C177.1 J3.91 R106.1 U2.AA29 U10.68 | length 80.9
  Top Layer w0.1: U10.68@7.2,10.15 7.12,10.07 7.12,9.67 6.85,9.4 6.446,9.4 6.262,9.217 6.262,8.642 6,8.38 6,6.9 7,5.9 10.1,5.9 10.65,6.45 10.65,7.75 11.2,8.3 v2(12.4,8.3)
  Layer 1 w0.1: v2@12.4,8.35 v4(12.4,8.8) ; v2(25.762,23.404) 25.77,23.396 25.77,23.18 v4(25.95,23)
  Layer 2 w0.1: v1(7.162,10.129) 7.162,14.184 7.462,14.484 7.462,18.204 7.762,18.504 7.762,20.904 8.262,21.404 8.262,25.754 7.812,26.204 7.812,28.704 7.012,29.504 7.012,32.404 8.962,34.354 10.012,34.354 10.712,35.054 10.712,36.654 10.912,36.854 11.362,36.854 ; 11.362,36.854 11.532,36.854 ; 11.532,36.854 11.612,36.854 11.762,37.004 11.762,37.504 12.562,38.304 13.057,38.304 13.133,38.229 15.788,38.229 16.112,37.904 v6(16.512,37.904) v6@16.512,37.854 ; v4(12.4,8.8) 12.4,10.75 12.2,10.95 12.2,11.25 11.85,11.6 11.85,13.15 10.95,14.05 10.95,14.319 10.945,14.324 10.945,16.576 11.124,16.755 11.355,16.755 12.8,18.2 12.8,21.35 14.25,22.8 17.1,22.8 18.05,23.75 22.9,23.75 23.65,23 v4(25.95,23)
  Layer 7 w0.1: v6(16.512,37.904) 16.512,37.927 16.699,38.113 v5@16.699,38.411
  Layer 8 w0.12: v5(16.702,38.414) v3(16.702,38.854)
  Bottom Layer w0.12: J3.91@16.702,38.254 v3(16.702,38.854)
  Bottom Layer w0.3: R106.1@7.112,9.554 7.112,10.079 v1(7.162,10.129)
BT_UART_CTS_N: U2.W25 U10.11 | length 24.9
  Top Layer w0.12: U10.11@9.037,15.104 v2(10.73,15.104)
  Layer 1 w0.12: v2@10.734,15.1 v4(11.25,15.1) ; v4(27.5,22.05) 27.536,22.086 27.536,22.179 v2(27.762,22.404)
  Layer 2 w0.1: v4(11.25,15.1) 11.555,15.405 11.555,15.755 13.6,17.8 13.6,21.1 14.012,21.512 14.55,22.05 17.5,22.05 17.604,22.154 18.45,23 22.5,23 23.25,22.25 25.462,22.25 26.25,22.25 26.7,21.8 27.264,21.8 27.474,22.01 v4@27.49,22.01
BT_UART_RTS_N: U2.W26 U10.13 | length 25.5
  Top Layer w0.12: U10.13@8.362,15.879 8.452,15.969 8.452,16.144 8.662,16.354 9.162,16.354 9.412,16.104 10.404,16.104 v2@10.75,16.45
  Layer 1 w0.12: v2@10.734,16.45 v4(11.25,16.45) ; v4(27.015,22.157) v2(27.262,22.404)
  Layer 2 w0.1: v4(11.25,16.45) 11.29,16.49 11.54,16.49 13.1,18.05 13.1,21.35 14.3,22.55 17.2,22.55 18.15,23.5 22.8,23.5 23.5,22.8 25.462,22.8 25.747,22.8 25.832,22.715 26.068,22.715 26.103,22.75 26.4,22.75 26.6,22.95 26.8,22.95 27.015,22.735 v4(27.015,22.157)
  other v2: 10.73,16.454
BT_UART_RXD: U2.AA28 U10.12 | length 24.2
  Top Layer w0.12: U10.12@9.037,15.704 9.087,15.754 v2(10.73,15.754)
  Layer 1 w0.1: v2(26.262,23.404) 26.262,22.888 26.51,22.64 26.66,22.64 v4(26.7,22.6)
  Layer 1 w0.12: v2@10.666,15.75 v4(11.25,15.75)
  Layer 2 w0.1: v4(11.25,15.75) 11.29,15.79 11.29,15.89 13.35,17.95 13.35,21.2 14.012,21.862 14.304,22.154 14.45,22.3 17.35,22.3 18.3,23.25 22.65,23.25 23.4,22.5 25.462,22.5 26.543,22.5 26.643,22.6 v4(26.7,22.6)
BT_UART_TXD: U2.U25 U10.10 | length 25.5
  Top Layer w0.12: U10.10@9.037,14.504 v2@10.73,14.504
  Layer 1 w0.1: v4@27.015,20.95 27.5,20.95 27.743,21.193 27.743,21.385 v2(27.762,21.404)
  Layer 1 w0.12: v2@10.797,14.453 10.8,14.45 v4(11.25,14.45)
  Layer 2 w0.1: v4(11.25,14.45) 11.85,15.05 11.85,15.65 13.85,17.65 13.85,21 14.012,21.162 14.65,21.8 17.65,21.8 18.004,22.154 18.6,22.75 22.35,22.75 23.1,22 25.462,22 25.95,22 26.3,21.65 26.3,21.4 26.75,20.95 v4@26.955,20.95
  other v2: 10.73,14.454
  other v4: 27,20.95
CAMERA_GPIO: J3.97 U2.AE6 | length 40.9
  Layer 7 w0.08: 35.498,24.234 35.592,24.234 35.762,24.404 35.762,25.254 35.912,25.404 35.912,26.554 36.112,26.754 36.412,26.754 36.712,26.454 36.712,25.904 37.212,25.404 v1(37.262,25.404)
  Layer 7 w0.1: v5(15.738,37.224) 16.018,37.504 16.662,37.504 17.012,37.854 17.962,37.854 18.212,37.604 18.212,36.59 18.653,36.149 ; 18.654,36.149 18.712,36.091 18.712,36.054 19.112,35.654 19.112,35.454 19.362,35.204 19.362,34.054 19.662,33.754 19.887,33.754 20.312,33.329 20.312,33.054 20.662,32.704 20.662,31.154 20.812,31.004 20.812,30.654 20.412,30.254 20.412,29.504 20.962,28.954 20.962,26.954 20.812,26.804 20.812,26.304 21.012,26.104 21.462,26.104 21.712,25.854 21.712,24.804 24.217,22.3 25.462,22.3 27.35,22.3 27.784,22.734 29.082,22.734 29.262,22.554 31.042,22.554 31.362,22.234 31.966,22.234 32.126,22.074 32.399,22.074 32.592,22.268 32.592,22.534 32.762,22.704 34.612,22.704 34.932,23.024 34.932,24.041 35.126,24.234 35.498,24.234
  Layer 8 w0.12: v5(15.738,37.224) v3(15.738,37.664)
  Bottom Layer w0.1: J3.97@15.502,38.254 15.554,38.203 15.554,37.849 v3(15.738,37.664)
CHIP_ANT: ANT1.1 L14.2 L15.1 | length 0.6
  Top Layer w0.13: L14.2@1.962,19.024 L15.1@1.962,19.604
CHIP_ANT_M: C169.1 J2.1 L14.1 U11.3 | length 1.3
  Top Layer w0.12: L14.1@1.962,18.524 v1(1.962,17.944) 2.445,17.944 cw(c2.445,17.637) U11.3@2.662,17.854
CM4_GPIO0: J3.36 U2.AF14 | length 15.4
  Layer 7 w0.1: v1(33.262,25.904) 33.262,25.924 33.602,26.264 33.602,27.114 33.062,27.654 33.062,28.954 33.812,29.704 33.812,30.554 33.451,30.916 v5(33.451,32.166)
  Layer 8 w0.12: v5(33.451,32.166) v3(33.762,31.854)
  Bottom Layer w0.12: J3.36@27.902,35.544 27.902,34.825 29.723,33.004 30.112,33.004 30.312,32.804 30.912,32.804 31.462,32.254 33.512,32.254 33.726,32.041 33.726,31.891 v3(33.762,31.854)
CM4_GPIO1: J3.35 U2.AE16 | length 15.3
  Layer 7 w0.1: v5(28.623,35.993) 29.062,35.554 29.512,35.554 29.717,35.349 29.717,34.004 30.467,33.254 31.012,33.254 31.462,32.804 31.462,31.454 31.46,31.452 31.46,30.357 31.737,30.079 31.737,28.979 31.912,28.804 31.912,27.154 31.812,27.054 31.812,26.254 32.262,25.804 v1(32.262,25.404)
  Layer 8 w0.12: v3(28.312,36.304) v5(28.623,35.993)
  Bottom Layer w0.12: J3.35@27.902,38.254 27.902,36.714 v3(28.312,36.304)
CM4_GPIO2: J3.58 U2.AD14 | length 18.4
  Layer 7 w0.1: v5(31.812,31.194) 31.812,30.404 32.112,30.104 32.112,27.104 32.592,26.624 32.592,25.224 32.912,24.904 v1(33.262,24.904)
  Layer 8 w0.12: v3(31.812,30.754) v5(31.812,31.194)
  Bottom Layer w0.12: J3.58@23.502,35.544 23.502,35.064 24.262,34.304 25.292,34.304 26.892,32.704 27.112,32.704 27.512,32.304 27.512,31.873 27.522,31.863 27.522,31.744 27.732,31.534 28.191,31.534 28.271,31.454 30.112,31.454 30.452,31.114 31.452,31.114 v3(31.812,30.754)
CM4_GPIO3: J3.56 U2.AC14 | length 20.3
  Layer 7 w0.1: v5(32.462,31.194) 32.502,31.154 32.502,31.014 32.962,30.554 32.962,29.804 32.412,29.254 32.412,27.204 32.862,26.754 32.862,25.604 33.027,25.439 33.577,25.439 33.762,25.254 33.762,24.604 33.562,24.404 v1(33.262,24.404)
  Layer 8 w0.12: v3(32.462,30.754) v5(32.462,31.194)
  Bottom Layer w0.12: J3.56@23.902,35.544 23.902,35.064 24.392,34.574 25.401,34.574 26.971,33.004 27.312,33.004 27.802,32.514 27.802,32.005 28.053,31.754 30.312,31.754 30.662,31.404 32.162,31.404 32.462,31.104 v3(32.462,30.754)
CM4_GPIO4: J3.54 U2.AH14 | length 16.7
  Layer 7 w0.1: v5(33.112,31.194) 33.112,30.804 33.362,30.554 33.362,29.704 32.712,29.054 32.712,27.454 v1(33.262,26.904)
  Layer 8 w0.12: v3(33.112,30.754) v5(33.112,31.194)
  Bottom Layer w0.12: J3.54@24.302,35.544 24.342,35.505 24.342,35.125 24.562,34.904 25.382,34.904 25.652,34.634 25.782,34.634 27.112,33.304 27.521,33.304 28.771,32.054 30.462,32.054 30.862,31.654 32.762,31.654 33.112,31.304 v3(33.112,30.754)
CM4_GPIO5: J3.34 U2.AJ12 | length 12.2
  Top Layer w0.08: 34.012,27.704 34.012,27.654 U2.AJ12@34.262,27.404
  Top Layer w0.12: v2(33.027,29.649) 33.362,29.314 33.362,28.754 34.012,28.104 34.012,27.704
  Layer 1 w0.12: v2(33.027,29.649) v4(33.027,29.999)
  Layer 2 w0.1: v6(28.162,34.454) 28.912,33.704 29.795,33.704 30.501,32.999 30.618,32.999 31.012,32.604 31.012,31.404 30.912,31.304 30.912,30.404 31.317,29.999 v4(33.027,29.999)
  Layer 7 w0.1: v6(28.162,34.454) v5(28.412,34.954)
  Layer 8 w0.12: v3(28.302,35.344) v5(28.412,34.954)
CM4_GPIO6: J3.30 U2.AF12 | length 15.6
  Layer 7 w0.1: v1(34.262,25.904) 34.592,26.234 34.592,27.509 34.69,27.607 34.963,27.607 35.262,27.907 35.262,28.254 34.912,28.604 34.912,31.004 34.662,31.254 34.662,31.704 34.412,31.954 v5(34.412,32.294)
  Layer 8 w0.12: v3(34.412,31.854) v5(34.412,32.294)
  Bottom Layer w0.12: J3.30@29.102,35.544 29.102,34.114 29.912,33.304 30.262,33.304 30.462,33.104 31.112,33.104 31.712,32.504 34.062,32.504 34.412,32.154 v3(34.412,31.854)
CM4_GPIO7: J3.37 U2.AJ10 | length 18.9
  Top Layer w0.08: 35.062,27.704 35.062,27.633 35.262,27.433 U2.AJ10@35.262,27.404
  Top Layer w0.12: v2@34.517,28.904 34.554,28.868 34.554,28.763 35.062,28.254 35.062,27.704
  Layer 1 w0.12: v2(34.517,28.854) v4(34.517,29.204)
  Layer 2 w0.1: v6(27.502,37.974) 27.022,37.494 27.022,36.914 26.872,36.764 26.372,36.764 26.262,36.654 26.262,36.107 27.215,35.154 29.162,35.154 29.518,34.799 30.909,34.799 31.112,34.596 31.112,33.904 31.587,33.429 31.587,33.179 31.812,32.954 31.812,32.254 33.012,31.054 33.612,31.054 34.212,30.454 34.212,29.854 34.517,29.549 v4(34.517,29.204)
  Layer 7 w0.1: v6(27.502,37.974) v5(27.502,38.414)
  Layer 8 w0.12: v5(27.502,38.414) v3(27.502,38.854)
  Bottom Layer w0.12: J3.37@27.502,38.254 v3(27.502,38.854)
CM4_GPIO8: J3.39 U2.AJ22 | length 13.2
  Top Layer w0.1: U2.AJ22@29.262,27.404 29.262,27.704
  Top Layer w0.12: 29.262,27.704 29.262,27.858
  Layer 1 w0.12: v2(29.357,28.004) v4(29.357,28.354)
  Layer 2 w0.1: v4(29.357,28.354) v6(29.712,28.104)
  Layer 7 w0.1: v5(27.512,35.864) 27.512,35.851 27.312,35.651 27.312,34.354 27.562,34.104 28.162,34.104 28.962,33.304 28.962,32.754 28.662,32.454 28.662,31.604 29.412,30.854 29.412,28.404 v6(29.712,28.104)
  Layer 8 w0.12: v5(27.512,35.864) v3(27.512,36.304)
  Bottom Layer w0.12: J3.39@27.102,38.254 27.102,36.714 v3(27.512,36.304)
CM4_GPIO9: J3.40 U2.AH20 | length 12
  Top Layer w0.08: 30.012,27.704 30.012,27.154 U2.AH20@30.262,26.904
  Top Layer w0.12: 30.012,27.704 30.012,27.863 30.102,27.953 v2(30.102,28.004)
  Layer 1 w0.12: v2(30.102,28.004) v4(30.102,28.354)
  Layer 2 w0.1: v4(30.102,28.354) v6(30.457,28.604)
  Layer 7 w0.1: v5(29.862,32.214) 30.552,32.214 30.712,32.054 30.712,31.454 30.512,31.254 30.512,30.354 31.012,29.854 31.012,29.159 v6(30.457,28.604)
  Layer 8 w0.12: v5(29.862,32.214) v3(29.862,32.654)
  Bottom Layer w0.12: J3.40@27.102,35.544 27.102,35.094 26.962,34.954 26.962,34.684 27.463,34.183 27.934,34.183 29.462,32.654 v3(29.862,32.654)
CM4_GPIO10: J3.44 U2.AJ21 | length 10.8
  Top Layer w0.1: U2.AJ21@29.762,27.404 29.762,27.704
  Top Layer w0.12: v2(29.357,28.799) 29.762,28.394 29.762,27.704
  Layer 1 w0.12: v2(29.357,28.799) v4(29.357,29.149)
  Layer 2 w0.1: v4(29.357,29.149) 29.817,29.149 v6(29.862,29.104)
  Layer 7 w0.1: v5(29.012,32.214) 29.012,31.954 29.762,31.204 29.762,30.054 30.162,29.654 30.162,29.404 v6(29.862,29.104)
  Layer 8 w0.12: v5(29.012,32.214) v3(29.012,32.654)
  Bottom Layer w0.12: J3.44@26.302,35.544 26.342,35.505 26.342,34.925 27.362,33.904 27.762,33.904 v3(29.012,32.654)
CM4_GPIO11: J3.38 U2.AH21 | length 11.6
  Layer 1 w0.1: v2(29.762,26.904) v4(29.762,27.254)
  Layer 2 w0.1: v6(29.262,27.254) v4(29.762,27.254)
  Layer 7 w0.1: v5(26.712,34.804) 26.712,33.904 27.262,33.354 27.662,33.354 27.812,33.204 27.812,32.804 27.462,32.454 27.462,31.204 27.912,30.754 28.362,30.754 28.662,30.454 28.662,27.854 v6(29.262,27.254)
  Layer 8 w0.12: v5(26.712,34.804) 26.722,34.814 v3(27.277,34.814)
  Bottom Layer w0.12: v3(27.277,34.814) 27.277,34.819 27.502,35.044 J3.38@27.502,35.544
CM4_GPIO12: J3.31 R32.1 U2.AJ11 | length 26.2
  Top Layer w0.08: U2.AJ11@34.762,27.404 34.762,27.704
  Top Layer w0.12: v2(33.772,29.649) 34.162,29.259 34.162,28.754 34.762,28.154 34.762,27.704
  Layer 1 w0.12: v2(33.772,29.649) v4(33.772,29.999)
  Layer 2 w0.1: v6(28.212,38.154) 27.962,38.404 27.262,38.404 26.962,38.104 26.962,37.954 26.612,37.604 26.212,37.604 25.952,37.344 25.952,36.064 27.112,34.904 28.862,34.904 29.262,34.504 29.412,34.504 29.612,34.304 30.206,34.304 30.406,34.104 30.406,33.804 30.459,33.751 30.559,33.651 30.611,33.599 31.068,33.599 31.312,33.354 31.312,33.054 31.562,32.804 31.562,32.054 32.862,30.754 33.412,30.754 33.772,30.394 v4(33.772,29.999) 33.772,29.744 34.162,29.354 34.162,29.054 v6(34.512,28.704)
  Layer 7 w0.1: v6(28.212,38.154) 28.268,38.154 28.487,38.374 28.662,38.374 v5(28.702,38.414) ; v6(34.512,28.704) 34.512,28.637 34.872,28.277 34.872,28.045 v5(34.912,28.004)
  Layer 8 w0.12: v5(28.702,38.414) v3(28.702,38.854) ; v3(34.912,27.554) v5(34.912,28.004)
  Bottom Layer w0.1: R32.1@32.012,26.954 32.562,26.954 32.867,27.259 34.267,27.259 34.562,27.554 v3(34.912,27.554)
  Bottom Layer w0.12: J3.31@28.702,38.254 v3(28.702,38.854)
CM4_GPIO13: J3.28 R33.1 U2.AH11 | length 16.7
  Top Layer w0.08: 34.512,27.704 34.512,27.154 U2.AH11@34.762,26.904
  Top Layer w0.12: v2@33.772,28.904 33.809,28.868 33.809,28.708 34.512,28.004 34.512,27.704
  Layer 1 w0.12: v2(33.772,28.854) v4(33.772,29.204)
  Layer 2 w0.1: v6(29.262,34.054) 29.929,34.054 30.206,33.777 30.206,33.579 30.431,33.354 30.862,33.354 31.012,33.204 31.012,32.904 31.262,32.654 31.262,31.949 32.807,30.404 33.24,30.404 33.467,30.178 33.467,29.509 v4(33.772,29.204) 33.762,29.194 v6(33.762,28.704)
  Layer 7 w0.1: v6(29.262,34.054) 29.305,34.097 29.305,34.391 29.412,34.498 v5(29.412,34.554) ; v6(33.762,28.704) v5(33.912,27.994)
  Layer 8 w0.12: v5(29.412,34.554) v3(29.502,34.944) ; v3(33.912,27.554) v5(33.912,27.994)
  Bottom Layer w0.1: R33.1@30.862,27.404 32.412,27.404 32.562,27.554 v3(33.912,27.554)
  Bottom Layer w0.12: v3(29.502,34.944) J3.28@29.502,35.544
CM4_GPIO14: J3.55 R36.1 U2.AC16 | length 77.7
  Layer 2 w0.1: v6(9.662,37.654) 10.212,37.654 10.962,38.404 11.812,38.404 12.212,38.804 16.762,38.804 17.74,37.827 18.09,37.827 18.412,37.504 19.512,37.504 19.712,37.304 20.212,37.304 20.412,37.504 21.317,37.504 21.667,37.854 23.657,37.854 24.257,37.254 24.257,36.959 v6(24.312,36.904)
  Layer 7 w0.1: v6(9.662,37.654) 9.662,36.454 9.062,35.854 9.062,32.054 8.312,31.304 7.912,31.304 7.562,30.954 7.562,24.359 7.917,24.004 8.562,24.004 9.962,22.604 9.962,16.204 9.112,15.354 9.112,8.554 9.812,7.854 9.812,3.504 10.362,2.954 11.397,2.954 v5(11.722,2.629) ; v5(24.323,37.343) 24.318,37.338 24.318,36.91 v6(24.312,36.904) 24.312,35.504 24.812,35.004 25.062,35.004 25.662,34.404 25.662,33.304 26.412,32.554 26.412,32.254 26.062,31.904 26.062,30.854 26.862,30.054 26.862,29.454 27.362,28.954 27.362,27.504 28.087,26.779 28.387,26.779 28.862,26.304 28.862,23.838 29.126,23.574 31.399,23.574 31.612,23.788 31.612,24.204 31.812,24.404 v1(32.262,24.404)
  Layer 8 w0.12: v5(11.722,2.629) v3(12.162,2.629) ; v3(24.012,37.654) v5(24.323,37.343)
  Bottom Layer w0.12: J3.55@23.902,38.254 23.902,37.813 24.012,37.703 v3(24.012,37.654)
CM4_GPIO15: J3.51 R34.1 U2.AH19 | length 77.2
  Layer 1 w0.1: v2(30.762,26.904) v4(30.762,27.254)
  Layer 2 w0.1: v6(9.662,38.904) 9.662,38.554 9.962,38.254 10.312,38.254 10.762,38.704 11.612,38.704 12.012,39.104 17.912,39.104 18.112,38.904 18.112,38.254 18.312,38.054 18.462,38.054 18.662,37.854 19.412,37.854 19.612,38.054 20.112,38.054 20.312,37.854 21.112,37.854 21.462,38.204 23.912,38.204 24.112,38.004 v6(25.112,38.004) ; v6(30.312,27.254) v4(30.762,27.254)
  Layer 7 w0.1: v6(9.662,38.904) 9.312,38.554 9.312,36.654 8.712,36.054 8.712,32.204 8.162,31.654 7.759,31.654 7.275,31.171 7.275,24.141 7.762,23.654 8.412,23.654 9.662,22.404 9.662,16.354 8.762,15.454 8.762,8.354 9.462,7.654 9.462,3.304 10.162,2.604 11.212,2.604 11.447,2.37 11.447,2.17 11.547,2.07 11.682,2.07 v5(11.722,2.029) ; v5(24.702,38.414) v6(25.112,38.004) 25.762,38.004 25.952,37.814 25.952,36.97 26.167,36.754 26.757,36.754 27.062,36.449 27.062,36.154 26.712,35.804 26.712,35.304 27.062,34.954 27.062,34.129 27.437,33.754 27.962,33.754 28.462,33.254 28.462,32.954 27.762,32.254 27.762,31.954 29.062,30.654 29.062,28.154 29.962,27.254 v6(30.312,27.254)
  Layer 8 w0.12: v5(11.722,2.029) v3(12.162,2.029) ; v5(24.702,38.414) v3(24.702,38.854)
  Bottom Layer w0.12: J3.51@24.702,38.254 v3(24.702,38.854)
CM4_GPIO16: J3.29 U2.AH10 | length 21.6
  Layer 7 w0.1: v5(29.102,37.214) 29.102,37.694 29.462,38.054 30.023,38.054 30.278,37.799 31.017,37.799 31.201,37.616 32.473,37.616 32.912,38.054 33.412,38.054 33.662,37.804 34.462,37.804 34.762,38.104 35.212,38.104 35.412,37.904 35.412,36.807 34.862,36.257 34.862,35.704 35.012,35.554 35.012,34.735 35.262,34.485 35.262,33.354 36.062,32.554 36.062,32.254 36.462,31.854 36.462,30.754 36.262,30.554 36.262,29.099 36.662,28.699 36.662,28.409 36.262,28.009 36.262,27.704 36.262,27.604 35.842,27.184 35.537,27.184 35.262,26.909 v1(35.262,26.904)
  Layer 8 w0.12: v5(29.102,37.214) v3(29.102,37.654)
  Bottom Layer w0.12: v3(29.102,37.654) J3.29@29.102,38.254
CM4_GPIO17: J3.50 U2.AH13 | length 17.4
  Top Layer w0.08: 33.512,27.704 33.512,27.154 U2.AH13@33.762,26.904
  Top Layer w0.12: v2@33.027,28.904 33.05,28.882 33.05,28.667 33.512,28.204 33.512,27.704
  Layer 1 w0.12: v2(33.027,28.854) v4(33.027,29.204)
  Layer 2 w0.1: v6(25.462,36.654) 25.462,36.267 25.691,36.038 25.691,35.926 26.762,34.854 26.762,34.654 27.362,34.054 27.762,34.054 28.012,33.804 28.412,33.804 28.754,33.463 29.462,33.463 29.941,32.984 30.233,32.984 30.712,32.504 30.712,31.504 30.545,31.338 30.545,30.221 31.262,29.504 32.727,29.504 v4(33.027,29.204)
  Layer 7 w0.1: v5(25.102,35.704) 25.102,36.294 v6(25.462,36.654)
  Layer 8 w0.12: v5(25.102,35.704) v3(25.102,36.144)
  Bottom Layer w0.12: J3.50@25.102,35.544 v3(25.102,36.144)
CM4_GPIO18: J3.49 R35.1 U2.AE20 | length 16.1
  Layer 7 w0.1: v5(25.413,37.343) 25.633,37.124 25.633,36.979 25.812,36.799 25.812,36.423 25.462,36.073 25.462,35.604 26.312,34.754 26.312,33.754 27.162,32.904 27.162,30.954 27.662,30.454 27.662,29.904 28.312,29.254 28.312,27.738 29.126,26.924 29.692,26.924 29.932,26.684 29.932,25.734 v1(30.262,25.404)
  Layer 8 w0.12: v3(25.102,37.654) v5(25.413,37.343)
  Bottom Layer w0.12: v3(25.102,37.654) J3.49@25.102,38.254 ; v1(30.262,25.404) R35.1@30.762,25.404
CM4_GPIO19: J3.26 R31.1 U2.AD20 | length 15.1
  Layer 7 w0.1: v5(29.762,33.404) 30.312,32.854 30.862,32.854 31.112,32.604 31.112,31.354 30.862,31.104 30.862,30.454 31.387,29.929 31.387,28.779 31.712,28.454 31.712,27.404 30.912,26.604 30.912,26.004 30.662,25.754 30.662,25.304 v1(30.262,24.904)
  Layer 8 w0.12: v5(29.762,33.404) v3(29.912,33.854)
  Bottom Layer w0.12: J3.26@29.902,35.544 29.902,33.864 v3(29.912,33.854) ; v1(30.262,24.904) 30.012,24.904 29.862,25.054 29.862,26.504 30.172,26.814 30.172,26.829 30.247,26.904 R31.1@30.262,26.904
CM4_GPIO20: J3.27 U2.AC20 | length 24.1
  Layer 7 w0.1: v5(29.502,38.414) 29.197,38.719 24.576,38.719 24.262,38.406 24.262,38.204 24.662,37.804 24.662,35.654 24.962,35.354 25.212,35.354 25.962,34.604 25.962,33.554 26.812,32.704 26.812,32.154 26.362,31.704 26.362,31.204 27.262,30.304 27.262,29.604 27.862,29.004 27.862,27.754 28.882,26.734 29.399,26.734 29.592,26.541 29.592,26.32 29.592,24.624 29.812,24.404 v1(30.262,24.404)
  Layer 8 w0.12: v5(29.502,38.414) v3(29.502,38.854)
  Bottom Layer w0.12: J3.27@29.502,38.254 v3(29.502,38.854)
CM4_GPIO21: J3.25 U2.AF20 | length 17.5
  Layer 7 w0.1: v5(29.492,35.864) 29.058,36.298 28.456,36.298 28.312,36.154 28.312,35.486 29.043,34.755 29.043,34.357 28.862,34.176 28.862,33.873 29.512,33.223 29.512,32.104 30.162,31.454 30.162,30.154 30.562,29.754 30.562,29.254 30.037,28.729 30.037,28.429 30.212,28.254 30.867,28.254 31.017,28.404 31.307,28.404 31.512,28.199 31.512,27.754 31.462,27.704 30.612,26.854 30.612,26.288 30.262,25.938 v1(30.262,25.904)
  Layer 8 w0.12: v5(29.492,35.864) v3(29.492,36.304)
  Bottom Layer w0.12: v3(29.492,36.304) 29.812,36.624 29.812,37.394 29.902,37.484 J3.25@29.902,38.254
CM4_GPIO22: J3.46 U2.AH9 | length 17.8
  Top Layer w0.08: 35.512,27.704 35.512,27.154 U2.AH9@35.762,26.904
  Top Layer w0.12: v2(34.517,29.649) 34.912,29.254 34.912,28.754 35.512,28.154 35.512,27.704
  Layer 1 w0.12: v2(34.517,29.649) v4(34.517,29.999)
  Layer 2 w0.1: v6(26.662,36.354) 26.662,36.344 26.905,36.102 26.905,35.748 27.248,35.404 29.512,35.404 29.862,35.054 31.162,35.054 31.462,34.754 31.462,34.104 31.937,33.629 31.937,33.279 32.162,33.054 32.162,32.354 33.162,31.354 33.812,31.354 34.517,30.649 v4(34.517,29.999)
  Layer 7 w0.1: v5(25.902,35.704) 25.957,35.704 26.607,36.354 v6(26.662,36.354)
  Layer 8 w0.12: v5(25.902,35.704) v3(25.902,36.144)
  Bottom Layer w0.12: J3.46@25.902,35.544 v3(25.902,36.144)
CM4_GPIO23: J3.47 U2.AD10 | length 23.3
  Layer 7 w0.08: 34.772,27.126 34.762,27.116 34.762,25.404 v1(35.262,24.904)
  Layer 7 w0.1: v5(25.502,38.414) 26.052,38.414 27.162,37.304 27.762,37.304 27.912,37.154 27.912,36.904 28.062,36.754 28.848,36.754 28.904,36.698 29.668,36.698 30.212,36.154 30.212,36.004 30.462,35.754 31.212,35.754 31.712,35.254 33.162,35.254 33.462,35.554 34.112,35.554 34.337,35.329 34.337,34.779 34.762,34.354 34.762,33.026 35.412,32.376 35.412,32.104 35.804,31.713 35.804,31.146 35.662,31.004 35.662,28.024 35.12,27.482 35.118,27.482 34.772,27.136 34.772,27.126
  Layer 8 w0.12: v5(25.502,38.414) v3(25.502,38.854)
  Bottom Layer w0.12: J3.47@25.502,38.254 v3(25.502,38.854)
CM4_GPIO24: J3.45 U2.AD12 | length 20.4
  Layer 7 w0.1: v5(26.342,37.654) 27.412,36.584 27.412,36.354 27.512,36.254 27.962,36.254 28.262,36.554 28.712,36.554 28.768,36.498 29.368,36.498 29.872,35.994 29.872,35.834 29.997,35.709 29.997,34.219 30.387,33.83 30.387,33.823 30.611,33.599 31.118,33.599 32.112,32.604 33.562,32.604 33.812,32.354 33.812,31.004 34.112,30.704 34.112,29.304 33.862,29.054 33.617,29.054 33.412,28.849 33.412,27.704 33.812,27.304 33.812,25.888 34.262,25.438 v1(34.262,24.904)
  Layer 8 w0.12: v3(25.902,37.654) v5(26.342,37.654)
  Bottom Layer w0.12: v3(25.902,37.654) J3.45@25.902,38.254
CM4_GPIO25: J3.41 U2.AE10 | length 22.2
  Layer 7 w0.1: v5(26.702,38.414) 26.702,38.164 27.242,37.624 28.542,37.624 28.762,37.404 28.762,37.123 28.987,36.898 29.256,36.898 29.412,37.054 29.762,37.054 30.262,36.554 30.645,36.554 30.646,36.553 31.363,36.553 31.962,35.954 34.262,35.954 34.712,35.504 34.712,34.752 35.062,34.402 35.062,33.154 35.712,32.504 35.712,32.254 36.112,31.854 36.112,30.954 35.912,30.754 35.912,27.754 35.635,27.477 35.37,27.477 35.128,27.234 35.126,27.234 34.932,27.041 34.932,25.734 v1(35.262,25.404)
  Layer 8 w0.12: v5(26.702,38.414) v3(26.702,38.854)
  Bottom Layer w0.12: J3.41@26.702,38.254 v3(26.702,38.854)
CM4_GPIO26: J3.24 U2.AH12 | length 12.2
  Layer 7 w0.1: v5(30.302,34.504) 30.439,34.642 30.454,34.642 30.611,34.799 30.901,34.799 31.106,34.594 31.106,34.46 31.262,34.304 31.262,33.954 32.387,32.829 33.832,32.829 34.107,32.554 34.107,31.259 34.512,30.854 34.512,29.254 34.162,28.904 34.162,28.554 34.262,28.454 v1(34.262,26.904)
  Layer 8 w0.12: v5(30.302,34.504) v3(30.302,34.944)
  Bottom Layer w0.12: v3(30.302,34.944) J3.24@30.302,35.544
CM4_GPIO27: J3.48 U2.AJ8 | length 18.5
  Top Layer w0.08: 35.962,27.704 U2.AJ8@36.262,27.404
  Top Layer w0.12: v2(35.262,28.854) 35.862,28.254 35.862,27.804 35.962,27.704
  Layer 1 w0.12: v4(35.262,28.354) v2(35.262,28.854)
  Layer 2 w0.1: v4(35.262,28.354) v6(35.262,28.804)
  Layer 7 w0.1: v5(35.062,32.294) 35.062,31.337 35.262,31.137 v6(35.262,28.804)
  Layer 8 w0.12: v3(35.062,31.854) v5(35.062,32.294)
  Bottom Layer w0.12: J3.48@25.502,35.544 25.542,35.505 25.542,35.125 25.762,34.904 25.912,34.904 27.212,33.604 27.612,33.604 28.887,32.329 30.037,32.329 30.212,32.504 30.662,32.504 31.262,31.904 33.162,31.904 33.527,31.539 34.747,31.539 v3(35.062,31.854)
CON_SCL0: J3.80 R149.1 U17.16 | length 30.9
  Top Layer w0.1: U17.16@33.862,36.804 33.881,36.824 33.881,37.124 34.362,37.604 34.962,37.604 35.162,37.404 35.162,36.954 35.412,36.704 35.612,36.704 v2(35.962,36.354) 35.962,35.223 36.077,35.108 36.077,35.042 36.2,34.92 36.2,33.3 36.079,33.179 R149.1@34.412,33.179
  Layer 1 w0.12: v4(35.715,36.602) v2(35.962,36.354)
  Layer 2 w0.1: v4(35.715,36.602) v6(36.165,36.602)
  Layer 7 w0.1: v5(20.062,36.454) 20.062,36.754 20.312,37.004 20.312,37.67 21.467,38.825 22.482,38.825 22.752,39.094 22.812,39.094 22.822,39.104 23.267,39.104 23.557,39.104 29.462,39.104 29.812,38.754 30.562,38.754 30.891,39.083 35.384,39.083 35.962,38.504 35.962,37.504 36.165,37.302 v6(36.165,36.602)
  Layer 8 w0.1: v3(19.512,36.454) v5(20.062,36.454)
  Bottom Layer w0.1: J3.80@19.102,35.544 19.102,36.057 19.5,36.454 v3(19.512,36.454)